# EAGLE board greenhousectrl-latest (EAGLE 7.7.0)

Size 76.2 x 85.09 mm. Coordinates in mm from the lower left corner, seen from the top.
Outline: 1.27,85.09 1.27,0 76.2,0 76.2,83.82 0,83.82
Copper layers (1*16): Top 0.035mm / dielectric 1.5mm / Bottom 0.035mm
Design rules "default *": minimum track width 10mil, minimum drill 24mil, track to track 8mil, track to pad 8mil, pad to pad 8mil, via to via 8mil, smd to smd 8mil, copper to edge 40mil, drill to drill 8mil, minimum pad ring 10mil, minimum via ring 8mil, stop-mask expansion 4mil, vias tented up to drill 0mil, thermal gap 10mil

## Footprints (pad centres in the part's own frame; a part is rotated, then mirrored left to right if it is on the bottom)
C025-024X044 = drill 0.813 pad 1.422 octagon: 1 -1.27,0; 2 1.27,0
0603-CAP = smd 1.1 x 1: 1 -0.85,0; 2 0.85,0
SOD-523 = smd 0.8 x 0.6: A 0,-0.8; K 0,0.8
SOD-323F = smd 1 x 0.8: A -1,0; C 1,0
06X1-PTH = drill 1.016 octagon: 1 -6.35,0; 2 -3.81,0; 3 -1.27,0; 4 1.27,0; 5 3.81,0; 6 6.35,0
TQFP32-08 = smd 1.27 x 0.559: 1 -4.293,2.8; 2 -4.293,2; 3 -4.293,1.2; 4 -4.293,0.4; 5 -4.293,-0.4; 6 -4.293,-1.2; 7 -4.293,-2; 8 -4.293,-2.8; 17 4.293,-2.8; 18 4.293,-2; 19 4.293,-1.2; 20 4.293,-0.4; 21 4.293,0.4; 22 4.293,1.2; 23 4.293,2; 24 4.293,2.8 | smd 0.559 x 1.27: 9 -2.8,-4.293; 10 -2,-4.293; 11 -1.2,-4.293; 12 -0.4,-4.293; 13 0.4,-4.293; 14 1.2,-4.293; 15 2,-4.293; 16 2.8,-4.293; 25 2.8,4.293; 26 2,4.293; 27 1.2,4.293; 28 0.4,4.293; 29 -0.4,4.293; 30 -1.2,4.293; 31 -2,4.293; 32 -2.8,4.293
MULTIWATT-15 = drill 1.2 long: 1 -8.89,-7.62; 2 -7.62,-2.54; 3 -6.35,-7.62; 4 -5.08,-2.54; 5 -3.81,-7.62; 6 -2.54,-2.54; 7 -1.27,-7.62; 8 0,-2.54; 9 1.27,-7.62; 10 2.54,-2.54; 11 3.81,-7.62; 12 5.08,-2.54; 13 6.35,-7.62; 14 7.62,-2.54; 15 8.89,-7.62
AVRISP = drill 0.9 pad 1.626: 1 -1.27,2.54; 2 1.27,2.54; 3 -1.27,0; 4 1.27,0; 5 -1.27,-2.54; 6 1.27,-2.54
POWER_JACK_SMD = smd 2.8 x 2.4: GND 0,-5.7; P$4 6.1,-5.7; VIN0 0,5.7; VIN1 6.1,5.7 | hole 2.032: 0,0; 4.572,0
SCREWTERMINAL-5MM-3 = drill 1.3 pad 2.413 square: 1 0,0 | drill 1.3 pad 2.413: 2 5,0; 3 10,0
PAD-JUMPER-2-NO_YES_SILK = smd 0.635 x 1.27: 1 -0.45,0; 2 0.45,0
RELAY-JZC = drill 1.3 pad 2.286: 1 3.81,-8.89; 2 -3.81,1.651; 3 -3.81,6.35; 4 3.81,3.81; 5 -3.81,-8.89
SOT23 = smd 1 x 1.4: 1 -0.95,-1.1; 2 0.95,-1.1; 3 0,1.1
DIL6-SMD = smd 1.78 x 1.52: 1 -2.54,-4.645; 2 0,-4.645; 3 2.54,-4.645; 4 2.54,4.645; 5 0,4.645; 6 -2.54,4.645
SOT23-3 = smd 0.8 x 0.9: 1 -0.95,-1; 2 0.95,-1; 3 0,1.1
M0805 = smd 1.3 x 1.6: 1 -0.95,0; 2 0.95,0
0402-RES = smd 0.85 x 0.9: 1 -0.58,0; 2 0.58,0
03P = drill 0.914 long: 1 -2.54,0; 2 0,0; 3 2.54,0
FE20 = drill 0.813 long: 1 -24.13,0; 2 -21.59,0; 3 -19.05,0; 4 -16.51,0; 5 -13.97,0; 6 -11.43,0; 7 -8.89,0; 8 -6.35,0; 9 -3.81,0; 10 -1.27,0; 11 1.27,0; 12 3.81,0; 13 6.35,0; 14 8.89,0; 15 11.43,0; 16 13.97,0; 17 16.51,0; 18 19.05,0; 19 21.59,0; 20 24.13,0
BTN_CK_KSS = smd 1.7 x 3.7: P$1 -2.95,0; P$2 2.95,0
SOT223 = smd 1.219 x 2.235: 1 -2.311,-3.099; 2 0,-3.099; 3 2.311,-3.099 | smd 3.6 x 2.2: 4 0,3.099
W237-102 = drill 1.194 long: 1 -2.5,-1.27; 2 2.5,-1.27
RESONATOR-SMD = smd 0.45 x 1.905: 1 -1.2,0; 2 0,0; 3 1.2,0

## Placement (x,y rotation side)
C3  [C025-024X044]  17.27,61.98 270 top
C4  0.1uF  [0603-CAP]  8.89,76.2 180 top
C5  [C025-024X044]  17.27,56.13 90 top
C6  0.1uF  [0603-CAP]  60.96,21.59 0 top
C7  0.1uF  [0603-CAP]  60.96,17.78 0 top
D1  [SOD-523]  10.16,25.4 90 top
D2  [SOD-523]  13.97,27.94 90 top
D3  [SOD-523]  10.16,27.94 90 top
D4  [SOD-523]  21.59,27.94 90 top
D5  [SOD-523]  17.78,27.94 90 top
D6  [SOD-523]  17.78,25.4 90 top
D7  [SOD-523]  21.59,25.4 90 top
D9  1N4148  [SOD-323F]  53.34,79.25 0 top
D10  Zener  [SOD-323F]  53.34,81.79 0 top
D11  [SOD-523]  13.97,25.4 90 top
FTDI-SERIAL-HEADER  HEADER-06X1-MALE  [06X1-PTH]  12.7,64.77 90 top
IC1  ATMEGA168TQFP-08  [TQFP32-08]  29.21,59.69 0 top
IC4  L298  [MULTIWATT-15]  16.51,21.59 0 top
ICSP-PROG-HEADER  AVRISP-6  [AVRISP]  46.99,20.32 270 top
J1  5.5x2.1mm Barrel  [POWER_JACK_SMD]  24.13,77.47 270 bottom
J3  [SCREWTERMINAL-5MM-3]  70.36,78.99 270 top
JP1  JUMPER-PAD-2-NOYES_SILK  [PAD-JUMPER-2-NO_YES_SILK]  49.02,81.79 0 top
K1  RELAYPTH4  [RELAY-JZC]  56.9,70.61 270 top
LD1  PL006-WCR12  [SOT23]  32.77,81.03 180 top
LD2  PL006-WCR12  [SOT23]  5.08,68.58 270 top
LED1  PL006-WCR13  [SOT23]  58.42,80.01 270 top
OK1  4N27SM  [DIL6-SMD]  8.89,40.64 180 top
OK2  4N27SM  [DIL6-SMD]  20.32,40.64 180 top
Q1  MMBT2222A  [SOT23-3]  45.97,80.01 270 top
R1  [M0805]  35.56,81.28 270 top
R2  [M0805]  5.08,76.2 180 top
R2(SMD)  [M0805]  6.35,73.66 180 top
R3  1K  [M0805]  41.15,81.53 180 top
R4  1K  [M0805]  62.99,80.52 270 top
R5  [M0805]  3.81,57.15 90 top
R6  [M0805]  3.81,62.23 90 top
R7  [M0805]  8.89,31.75 270 top
R8  [M0805]  24.13,31.75 270 top
R9  [M0805]  20.32,31.75 270 top
R10  [M0805]  15.24,31.75 270 top
R11  [M0805]  11.43,31.75 270 top
R12  [M0805]  17.78,31.75 270 top
R13  [0402-RES]  55.88,17.78 0 top
R14  [0402-RES]  52.07,17.78 0 top
SL1  [03P]  34.29,3.81 0 top
SL2  [03P]  49.53,3.81 0 top
SL3  [03P]  57.15,3.81 0 top
SL4  [03P]  41.91,3.81 0 top
SV1  [FE20]  39.37,52.07 90 top
SW1  [BTN_CK_KSS]  13.21,79.5 90 top
U2  V_REG_317SMD  [SOT223]  64.77,49.53 0 top
X1-MOT1  [W237-102]  11.43,6.35 0 top
X2-MOT2  [W237-102]  22.86,6.35 0 top
Y2  16MHZ  [RESONATOR-SMD]  7.62,64.77 0 bottom

## Library data of the parts
C3 C5 D1-D7 D10 D11 ICSP-PROG-HEADER R1 R2 R2(SMD) R3-R12 SW1 = adafruit
C4 C6 C7 = SparkFun-Capacitors; PROD_ID: CAP-00810
D9 = adafruit; PROD_ID: DIO-08378
FTDI-SERIAL-HEADER = GeekAmmo; OTHER: 4UCON 00834; URL: http://www.4uconnector.com/online/SearchPro.asp?FormName=ProSearch&FormAction=search&s_GroupNo=&s_keyword=00834
IC1 = atmega328p
IC4 = st-microelectronics; MPN: L298N; OC_FARNELL: 1589425; OC_NEWARK: 32M1527
J1 = SparkFun-Connectors; PROD_ID: CONN-08106; SF_ID: PRT-12748
J3 = SparkFun-Connectors; PROD_ID: CONN-10134; STOREFRONT_ID: PRT-08433
JP1 = SparkFun-Passives
K1 = SparkFun-Electromechanical
LD1 LD2 = led
LED1 = led; PROD_ID: DIO-09529
OK1 OK2 = optocoupler; MF: FAIRCHILD SEMICONDUCTOR; MPN: 4N27S-M; OC_FARNELL: unknown; OC_NEWARK: 05C3300
Q1 = SparkFun-DiscreteSemi; PROD_ID: TRANS-08049
R13 R14 = SparkFun-Resistors
SL1-SL4 = con-amp-quick; OC_FARNELL: unknown; OC_NEWARK: unknown
SV1 = con-lsta; OC_FARNELL: unknown; OC_NEWARK: unknown
U2 = SparkFun-PowerIC
X1-MOT1 X2-MOT2 = con-wago-500; MPN: 237-102; OC_FARNELL: unknown; OC_NEWARK: 70K9898
Y2 = SparkFun-FreqCtrl; PROD_ID: XTAL-08900

## Nets
+5V: C3.1 C7.1 FTDI-SERIAL-HEADER.3 IC1.4 IC1.6 IC1.18 IC4.5 IC4.7 IC4.9 IC4.10 IC4.12 ICSP-PROG-HEADER.2 R2(SMD).2 R2.1 R14.2 SL1.2 SL2.2 SL3.2 SL4.2 SV1.2 SV1.15 U2.2
+12V: C5.1 C6.1 D1.K D3.K D5.K D7.K IC4.4 J1.VIN0 U2.3
ADC4: SV1.4
ADC5: SV1.5
COIL: D10.C JP1.1 K1.1 Q1.3 R4.1
COMMON: J3.3 K1.4
CTS(DOESNTEXIST): FTDI-SERIAL-HEADER.2
DIODENODE: D9.A D10.A JP1.2
DTR: C4.1 FTDI-SERIAL-HEADER.6
ENA: IC4.6 OK2.5
ENB: IC4.11 OK1.5
GND: C3.2 C5.2 C6.2 C7.2 D2.A D4.A D6.A D11.A FTDI-SERIAL-HEADER.1 IC1.3 IC1.5 IC1.21 IC4.8 ICSP-PROG-HEADER.6 J1.GND J1.P$4 LD1.3 LD2.3 OK1.6 OK2.6 Q1.2 R5.2 R6.2 R7.1 R9.1 R10.1 R12.1 R13.1 SL1.1 SL2.1 SL3.1 SL4.1 SV1.1 SV1.3 SV1.16 SW1.P$2 Y2.2
MISO: IC1.16 ICSP-PROG-HEADER.1 SV1.13
MOSI: IC1.15 ICSP-PROG-HEADER.4 SV1.12
N$1: OK2.1 R8.2
N$2: LD2.1 R2.2
N$3: LED1.3 R4.2
N$4: OK2.2 R7.2
N$5: OK2.4 R9.2
N$6: Q1.1 R3.1
N$7: R13.2 R14.1 U2.1
N$8: OK1.1 R11.2
N$9: OK1.2 R10.2
N$10: LD1.1 R1.1
N$11: IC1.7 Y2.1
N$15: OK1.4 R12.2
N$16: IC1.8 Y2.3
NC: J3.1 K1.2
NO: J3.2 K1.3
OUT1: D1.A D11.K IC4.2 X1-MOT1.1
OUT2: D2.K D3.A IC4.3 X1-MOT1.2
OUT3: D4.K D5.A IC4.13 X2-MOT2.1
OUT4: D6.K D7.A IC4.14 X2-MOT2.2
PB0: IC1.12 R3.2
PB1: IC1.13
PB2: IC1.14
PC0: IC1.23 SL1.3
PC1: IC1.24 SL2.3
PC2: IC1.25 SL3.3
PC3: IC1.26 SL4.3
PC4: IC1.27
PC5: IC1.28
PD2: IC1.32
PD3: IC1.1
PD4: IC1.2 R8.1
PD5: IC1.9 R11.1
PD6: IC1.10
PD7: IC1.11
RST: C4.2 IC1.29 ICSP-PROG-HEADER.5 R2(SMD).1 SW1.P$1
RX: FTDI-SERIAL-HEADER.5 IC1.30
SCK: IC1.17 ICSP-PROG-HEADER.3 R1.2 SV1.14
SEN_A: IC4.1 R5.1
SEN_B: IC4.15 R6.1
SS: SV1.11
TX: FTDI-SERIAL-HEADER.4 IC1.31
VCC: D9.C K1.5 LED1.1

## Tracks (layer width: path | path; a pad name or v marks a point on that pad's centre or on a via)
+5V  (21 unrouted)
+12V  (8 unrouted)
COIL  (4 unrouted)
COMMON  (1 unrouted)
DIODENODE  (2 unrouted)
DTR  (1 unrouted)
ENA  (1 unrouted)
ENB  (1 unrouted)
GND  (36 unrouted)
MISO  (2 unrouted)
MOSI  (2 unrouted)
N$1  (1 unrouted)
N$2  (1 unrouted)
N$3  (1 unrouted)
N$4  (1 unrouted)
N$5  (1 unrouted)
N$6  (1 unrouted)
N$7  (2 unrouted)
N$8  (1 unrouted)
N$9  (1 unrouted)
N$10  (1 unrouted)
N$11  (1 unrouted)
N$15  (1 unrouted)
N$16  (1 unrouted)
NC  (1 unrouted)
NO  (1 unrouted)
OUT1  (3 unrouted)
OUT2  (3 unrouted)
OUT3  (3 unrouted)
OUT4  (3 unrouted)
PB0  (1 unrouted)
PC0  (1 unrouted)
PC1  (1 unrouted)
PC2  (1 unrouted)
PC3  (1 unrouted)
PD4  (1 unrouted)
PD5  (1 unrouted)
RST  (4 unrouted)
RX  (1 unrouted)
SCK  (3 unrouted)
SEN_A  (1 unrouted)
SEN_B  (1 unrouted)
TX  (1 unrouted)
VCC  (2 unrouted)
(copper drawn outside any net)
  shapes: Bottom area x2, Top area x2